# Altium PCB PS.PcbDoc
Units mm, origin at the board's own origin, x right, y up, seen from the top; angles counter-clockwise.
Board outline 56.31 x 32.82 mm, 2 copper layers (Top Layer, Bottom Layer); 16 components, 30 nets, 38 pads, 0 vias.
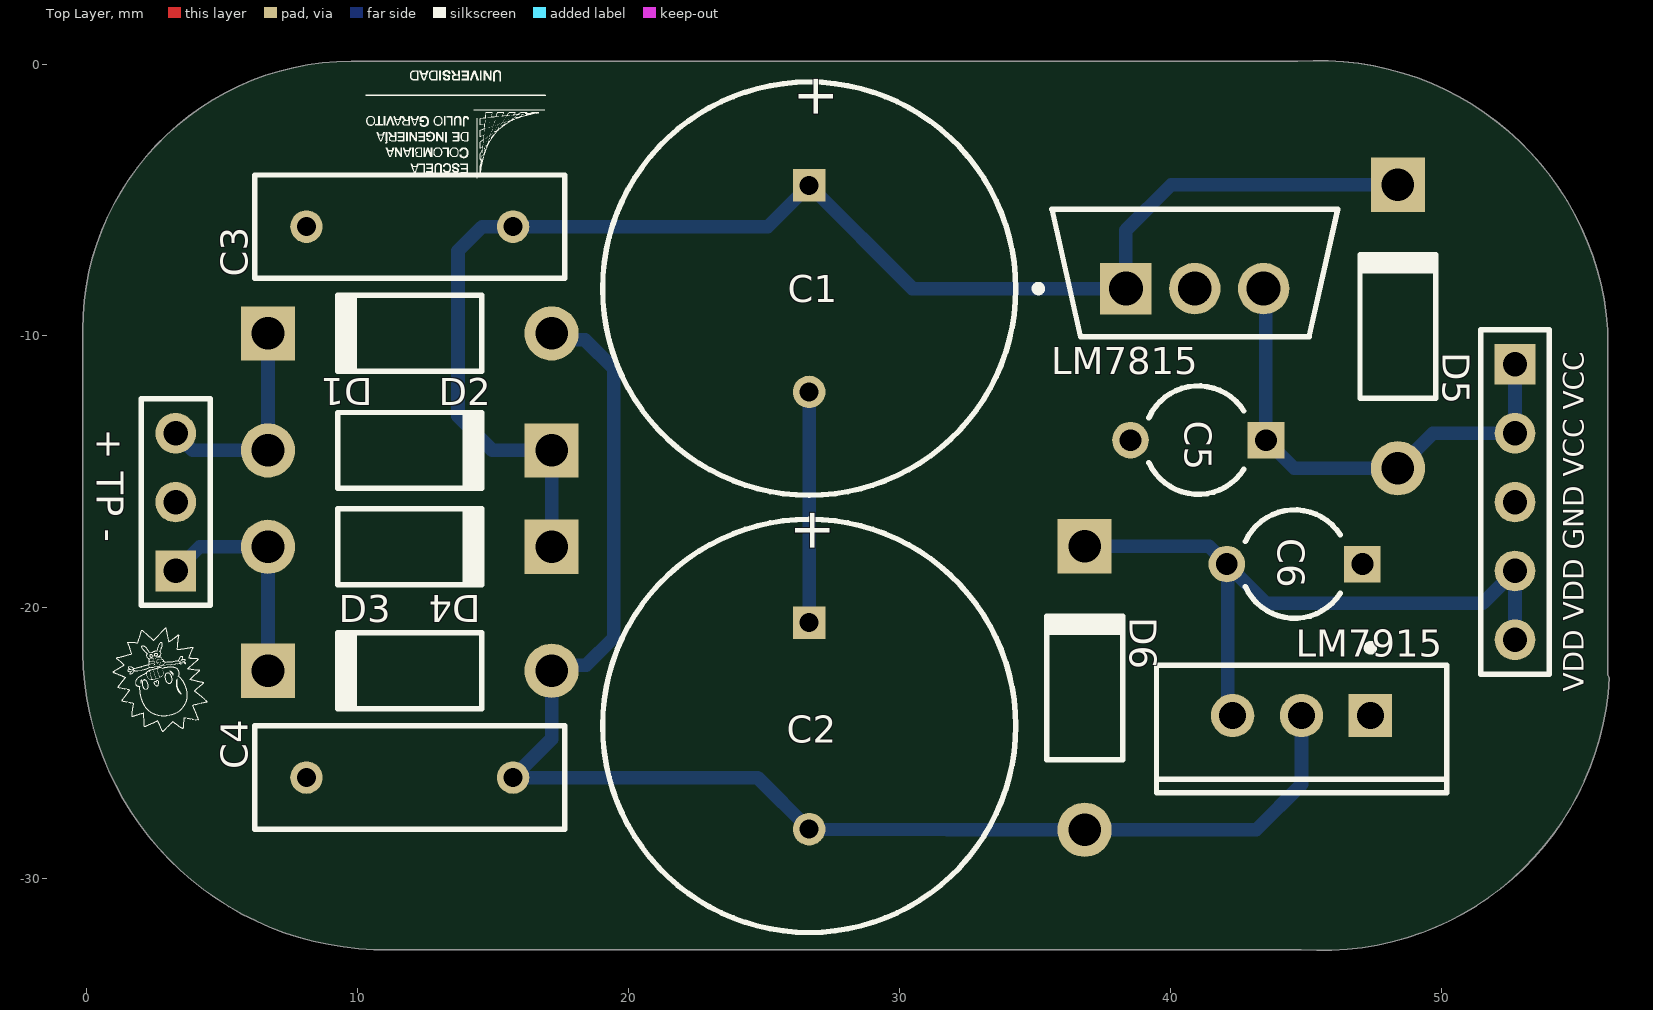
[diagram p0: Top Layer view]
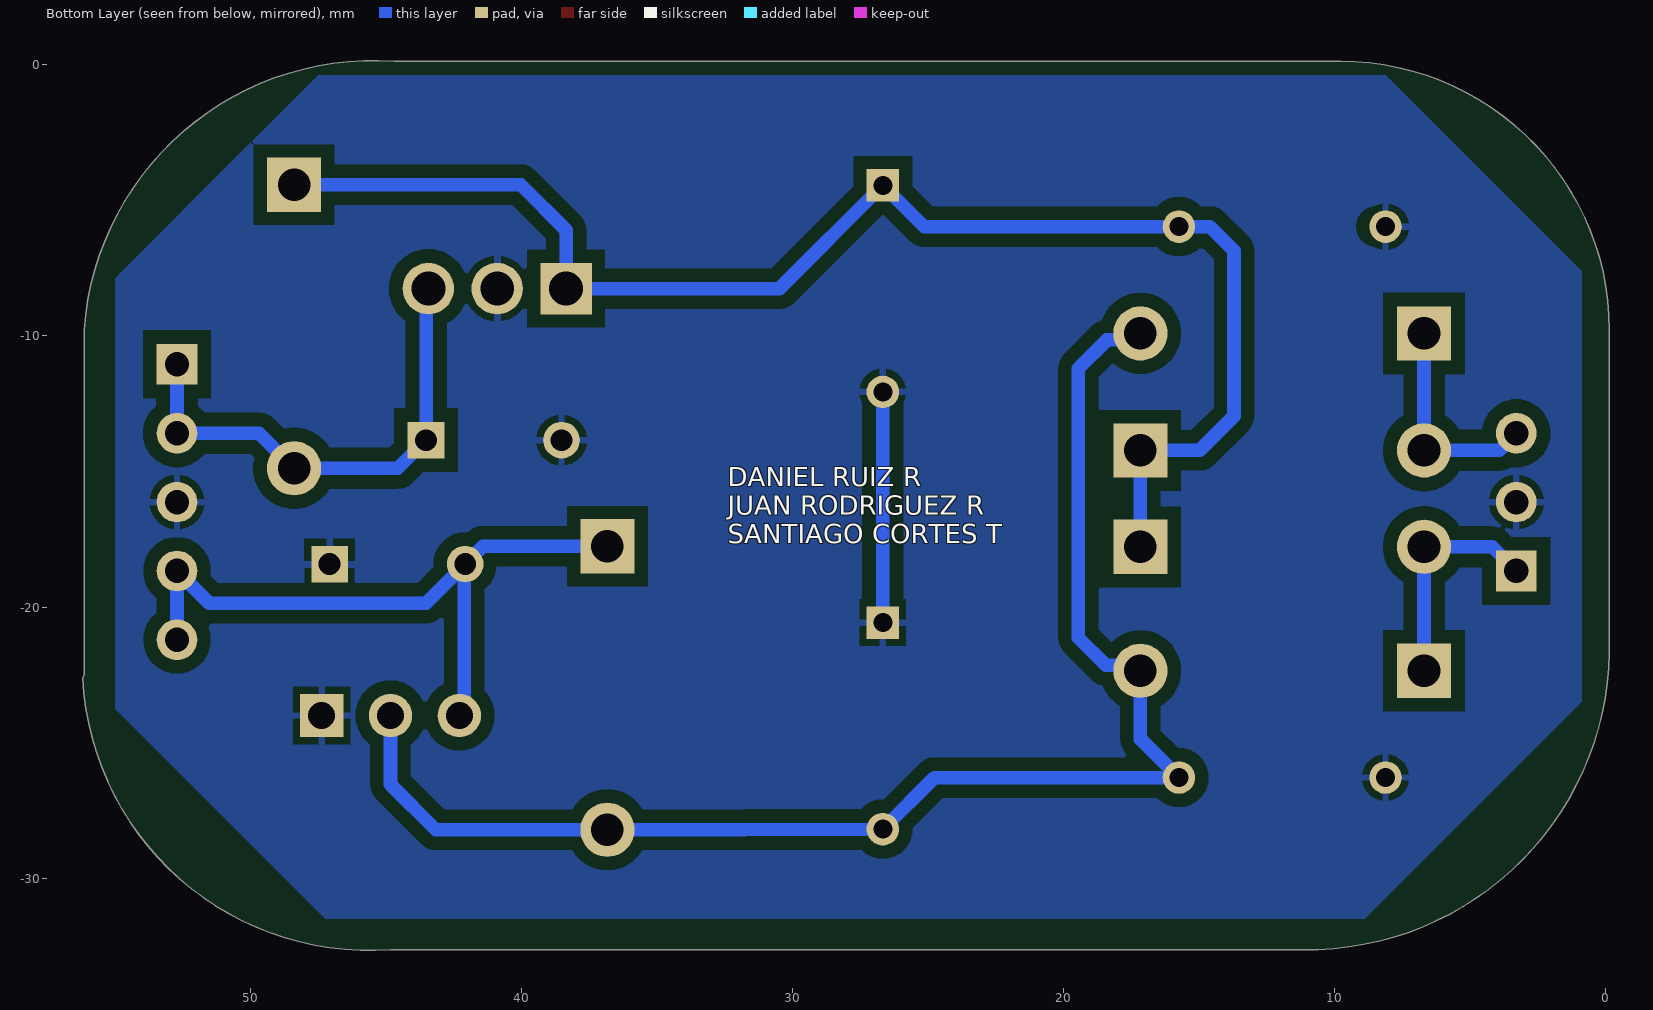
[diagram p1: Bottom Layer view, seen from below]

## Layer stack, top to bottom
Top Solder: solder mask 0.0102, Solder Resist, Dk 3.5
Top Layer: signal copper 0.0356
Dielectric 1: dielectric 0.32, FR-4, Dk 4.8
Bottom Layer: signal copper 0.0356
Bottom Solder: solder mask 0.0102, Solder Resist, Dk 3.5

## Board outline
-0.127,-21.683 -0.127,-9.779 cw(c9.779,-9.779) 9.779,0.127 44.699,0.127 cw(c45.466,-10.541) 56.134,-9.77 56.134,-9.779 56.134,-22.507 56.185,-22.615 cw(c45.61,-22.081) 44.826,-32.639 11.177,-32.639 cw(c11.003,-21.509)

## Design rules (kind name [scope] priority, off if disabled: settings)
Clearance Clearance_1 [All] p1: gap=0.5 ignorepadtopadclearanceinfootprint=FALSE
Clearance Clearance_GND [InNet('GND') vs InNet('GND')] p2: gap=0.5 ignorepadtopadclearanceinfootprint=FALSE
PolygonConnect [All] p1: connectstyle=Relief reliefconductorwidth=0.254 reliefentries=4 polygonreliefangle="90 Angle" airgapwidth=0.254
RoomDefinition [InComponentClass('PS') vs False] p1: confinementstyle=ConfineIn formatcopy=TRUE lockcomponents=FALSE outline 0.22,-21.463 -0.035,-9.77 3.248,-3.248 9.669,-0.067 46.237,-0.053 52.569,-3.063 55.954,-9.77 55.954,-22.742 52.883,-29.137 44.704,-32.547 11.303,-32.547 3.023,-28.851
RoutingLayers [All] p1: top layer_v5=FALSE bottom layer_v5=TRUE
RoutingVias [All] p1: holewidth=0.711 width=1.27 viastyle="Through Hole" minholewidth=0.711 minwidth=1.27 maxholewidth=0.711 maxwidth=1.27
SolderMaskExpansion [All] p1: expansion=0.102 istentingtop=FALSE
Width [All] p1: maxlimit=1 minlimit=0.254 preferedwidth=0.5
29 further rules are at their usual default settings.

## Components (designator, comment, footprint, x,y, rotation, side; value= is the part's Value field where it differs from the comment)
"+ TP -" "Header 3" HDR1X3 3.302,-18.669 r90 top (schematic designator IN)
C1 "Cap Pol1" RB7.6-15 26.67,-8.255 r90 top value=4700uF
C2 "Cap Pol1" RB7.6-15 26.67,-24.384 r90 top value=4700uF
C3 "Cap" RAD-0.3 11.938,-5.969 r0 top value=100nF
C4 "Cap" RAD-0.3 11.938,-26.289 r180 top value=100nF
C5 "Cap2" CAPR5-4X5 41.021,-13.843 r180 top value=10uF
C6 "Cap2" CAPR5-4X5 44.577,-18.415 r180 top value=10uF
D1 "Diode 1N4004" DO-41 11.938,-9.906 r180 top
D2 "Diode 1N4004" DO-41 11.938,-14.224 r0 top
D3 "Diode 1N4004" DO-41 11.938,-22.352 r180 top
D4 "Diode 1N4004" DO-41 11.938,-17.78 r0 top
D5 "Diode 1N4004" DO-41 48.387,-9.652 r90 top
D6 "Diode 1N4004" DO-41 36.83,-22.987 r90 top
LM7815 "LM7815" FP-NDE0003B-MFG 40.894,-7.682 r90 top
LM7915 "LM7915" NDE0003A 44.831,-24.003 r180 top
"VDD VDD GND VCC VCC" "Header 5" HDR1X5 52.705,-11.049 r270 top (schematic designator out)

## Footprints (in the part's own frame and the unit in brackets; to place one, negate y for a bottom-side part, rotate by r counter-clockwise, add the part's x,y. Pads: shape width x height; smd on the part's side, far side on the other; paste and mask are expansions set on the pad)
CAPR5-4X5 [mm] "Capacitor; 2 Leads"
  rect 1.35x1.35 hole 0.8: 1(-2.5,0)
  round 1.35 hole 0.8: 2(2.5,0)
  silkscreen extent -1.69,-2 1.82,2
DO-41 [mm] "Diode, Axial; Body 5.2 x 2.7 mm (LxDia. max), Lead Dia. 0.86 mm (max)"
  round 2 hole 1.2: 1(-5.23,0)
  rect 2x2 hole 1.2: 2(5.23,0)
  silkscreen extent -2.65,-1.4 2.75,1.4
FP-NDE0003B-MFG [mm]
  rect 1.9x1.9 hole 1.25 paste-2539.97 mask+0: 1(-0.573,2.54)
  round 1.9 hole 1.25 paste-2539.97 mask+0: 2(-0.573,0) 3(-0.573,-2.54)
  silkscreen extent -2.35,-5.27 2.35,5.89, body extent -2.45,-5.37 2.45,5.37, height 0.25
HDR1X3 [mm] "Connector; Header; 3 Position"
  rect 1.5x1.5 hole 0.9: 1(0,0)
  round 1.5 hole 0.9: 2(2.54,0) 3(5.08,0)
  silkscreen extent -1.27,-1.27 6.35,1.27
HDR1X5 [mm] "Connector; Header; 5 Position"
  rect 1.5x1.5 hole 0.9: 1(0,0)
  round 1.5 hole 0.9: 2(2.54,0) 3(5.08,0) 4(7.62,0) 5(10.16,0)
  silkscreen extent -1.27,-1.27 11.43,1.27
NDE0003A [mm] "FM, 3-Leads, Body 10.7x4.7mm, Pitch 2.54mm"
  rect 1.6x1.6 hole 1: 1(-2.54,0)
  round 1.6 hole 1: 2(0,0) 3(2.54,0)
  silkscreen extent -5.35,-2.62 5.35,2.85, body extent -5.4,-1.9 5.4,2.9, height 19.4
RAD-0.3 [mm] "Radial Cap, Thru-Hole; 2 Leads; 0.3 in Pin Spacing"
  round 1.2 hole 0.7: 1(-3.81,0) 2(3.81,0)
  silkscreen extent -5.71,-1.91 5.71,1.91
RB7.6-15 [mm] "Polarized Capacitor (Radial); 2 Leads"
  rect 1.2x1.2 hole 0.7: 1(3.81,0)
  round 1.2 hole 0.7: 2(-3.81,0)
  silkscreen extent -7.62,-7.62 7.62,7.62

## Part data
"+ TP -": "Header, 3-Pin", LatestRevisionDate=17-Jul-2002, LatestRevisionNote="Re-released for DXP Platform.", Publisher="Altium Limited"
C1 C2: "Polarized Capacitor (Radial)", LatestRevisionDate=17-Jul-2002, LatestRevisionNote="Re-released for DXP Platform.", PackageDescription="Polarized Capacitor (Radial); 2 Leads", PackageReference=RB7.6-15, Published=8-Jun-2000, Publisher="Altium Limited"
C3 C4 C5 C6: "Capacitor", Publisher="Altium Limited"
  C3 C4: LatestRevisionDate=17-Jul-2002, LatestRevisionNote="Re-released for DXP Platform.", PackageDescription="Radial Cap, Thru-Hole; 2 Leads; 0.3 in Pin Spacing", PackageReference=RAD-0.3, Published=8-Jun-2000
  C5 C6: PackageDescription="Capacitor; 2 Leads", PackageReference=CAPR5-4X5, Published=23-Sep-2002
D1 D2 D3 D4 D5 D6: "1 Amp General Purpose Rectifier", Code_JEDEC=DO-204-AL, ComponentLink1Description="Manufacturer Link", ComponentLink1URL=http://www.fairchildsemi.com/, ComponentLink2Description=Datasheet, ComponentLink2URL=http://www.fairchildsemi.com/ds/1N%2F1N4001.pdf, DatasheetVersion=1998, LatestRevisionDate=17-Jul-2002, LatestRevisionNote="Re-released for DXP Platform.", PackageDescription="Diode, Axial; Body 5.2 x 2.7 mm (LxDia. max), Lead Dia. 0.86 mm (max)", PackageReference=DO-41, PackageVersion=Aug-1999, Published=8-Jun-2000, Publisher="Altium Limited"
LM7815: library part CMP-04917-000014-1, "pin 1 in / pin 2 GND / pin 3 out", Dropout Voltage=2V, Manufacturer="Texas Instruments", Manufacturer Part Number=LM7815CT/NOPB, Max Junction Temp=+150°C, Max Supply Voltage=30V, Min Supply Voltage=7.5V, Nominal Supply Current=8mA, Output Current=1.5A, Output Voltage=15V, Package=NDE0003B, Temperature="0°C to +125°C", Temperature Range High=+125°C, Temperature Range Low=0°C, Accuracy Percentage=3%, Automotive=No, Category=IC, ComponentLink2Description=Datasheet, ComponentLink2URL=http://www.ti.com/lit/ds/symlink/lm7800.pdf, Device Class L1="Integrated Circuits (ICs)", Device Class L2="Power Management ICs", Device Class L3="Voltage Regulators - Linear", Digikey Description="IC REG LINEAR 15V 1A TO220-3", Height=19.55mm, Ipc Land Pattern Name=TO-220, Lead Free=Yes, Mouser Description="Linear Voltage Regulators 15 Volt Reg", Number Of Outputs=1, Octopart=https://octopart.com/lm7815ct%2Fnopb-texas+instruments-23919376, Output Type=Fixed, RoHS=TRUE, Standoff Height=3.3mm
LM7915: library part CMP-0062-02469-3, "pin 3 out / pin 2 in  / pin 1 GND", Manufacturer="Texas Instruments", PackageTopMarking=NSUZXYTTE#*LM7915CT, PowerWise=N, ComponentLink1Description="Datasheet URL", ComponentLink1URL=http://www.ti.com/general/docs/lit/getliterature.tsp?genericPartNumber=LM7915&fileType=pdf, CompType="LDO IC", PackageDescription="TO-220, Molded, 3 Lead, Straight", PackageReference=NDE0003A, PinCount=3, RoHS=Y
"VDD VDD GND VCC VCC": "Header, 5-Pin", LatestRevisionDate=17-Jul-2002, LatestRevisionNote="Re-released for DXP Platform.", Publisher="Altium Limited"

## Nets (pads, with @x,y where several pads share a name; then routed paths per layer and width w, separated by ;. In a path a pad name is that pad's centre, name@x,y a point inside that pad or via, vN(x,y) a via of type N, cw(c..) or ccw(c..) an arc to the next point about the centre after c; other vN are vias at no path point)
GND: "+ TP -.2" "VDD VDD GND VCC VCC.3" C1.2 C2.1 C3.1 C4.2 C5.2 C6.1 LM7815.2 LM7915.1 | length 8.8
  Bottom Layer w0.5: C3.1 C3.1@8.458,-5.969 ; C2.1 C1.2
NetC1_1: C1.1 C3.2 D2.2 D4.2 D5.2 LM7815.1 | length 53.7
  Bottom Layer w0.5: D4.2 D2.2 14.986,-14.224 13.716,-12.954 13.716,-6.858 14.605,-5.969 C3.2 25.146,-5.969 C1.1 30.48,-8.255 LM7815.1 38.354,-6.096 40.028,-4.422 D5.2
NetC2_2: C2.2 C4.1 D1.1 D3.1 D6.1 LM7915.2 | length 53.2
  Bottom Layer w0.5: D1.1 17.409,-10.147 18.402,-10.147 19.458,-11.203 19.458,-21.132 18.44,-22.149 17.371,-22.149 D3.1 17.168,-24.869 C4.1 24.765,-26.289 C2.2 31.773,-28.217 43.157,-28.217 44.831,-26.543 LM7915.2
NetC5_1: "VDD VDD GND VCC VCC.1" "VDD VDD GND VCC VCC.2" C5.1 D5.1 LM7815.3 | length 18.3
  Bottom Layer w0.5: LM7815.3@43.429,-8.26 43.516,-8.347 C5.1@43.516,-13.838 ; C5.1 44.56,-14.882 D5.1 49.68,-13.589 52.705,-13.589 52.705,-11.049
NetC6_2: "VDD VDD GND VCC VCC.4" "VDD VDD GND VCC VCC.5" C6.2 D6.2 LM7915.3 | length 25.5
  Bottom Layer w0.5: D6.2 41.419,-17.757 C6.2 ; LM7915.3 42.106,-23.818 42.106,-18.444 C6.2 ; 52.705,-21.209 52.705,-18.669 51.521,-19.853 43.515,-19.853 C6.2
NetD1_2: "+ TP -.3" D1.2 D2.1 | length 8
  Bottom Layer w0.5: 3.302,-13.589 3.937,-14.224 D2.1 D1.2
NetD3_2: "+ TP -.1" D3.2 D4.1 | length 8.3
  Bottom Layer w0.5: 3.302,-18.669 4.191,-17.78 D4.1 6.708,-20.091 D3.2
NetIN/OUT_1: 
NetNTC_1: 
NetNTC_2: 
NetR2_1: 
NetR3_1: 
NetR3_2: 
NetR4_2: 
NetR5_1: 
NetR6_1: 
NetR7_1: 
NetR9_2: 
NetR10_2: 
NetR11_1: 
NetR13_2: 
NetR14_2: 
NetR15_1: 
NetR15_2: 
NetRV3_2: 
NetU11_3: 
NetU11_8: 
NetU22_6: 
VCC: 
VDD: 

## Polygon pours and split planes (outlines as drawn)
GND on Bottom Layer "GND" (solid, pour order 0): 8.128,-0.381 0.889,-7.62 0.889,-23.495 8.89,-31.496 47.244,-31.496 54.991,-23.749 54.991,-7.874 47.498,-0.381 40.259,-0.381

## Silkscreen, mask and mechanical layers (free items; w line width, h text height)
Top Overlay:
  drawing of 69 lines, arcs and shapes, not listed
Bottom Overlay:
  text "DANIEL RUIZ R / JUAN RODRIGUEZ R / SANTIAGO CORTES T" at 32.385,-17.653 h0.7
Mechanical 1:
  lines w0.254: 44.704,0 cw(c45.466,-10.541) 56.007,-9.779 56.007,-22.606 ; 44.958,0 9.779,0 ccw(c9.779,-9.779) 0,-9.779 0,-21.683 ccw(c11.003,-21.509) 11.176,-32.512 44.831,-32.512 ccw(c45.61,-22.081) 56.057,-22.609

## Dimensions
56.769,0 to 2.032,-19.939 on Mechanical 1
53.975,-9.779 to 54.102,0 on Mechanical 1
0,-21.683 to 56.134,-9.779 on Mechanical 1
44.699,0.127 to 56.134,-22.507 on Top Assembly

## Text inside footprints (layer, text, board x,y; h text height)
C1: Top Overlay "+" at 27.559,-2.032 h1.5 r90
C2: Top Overlay "+" at 27.432,-18.034 h1.5 r90